# EAGLE board Front ECU rev6 (EAGLE 8.4.1), part 1 of 2
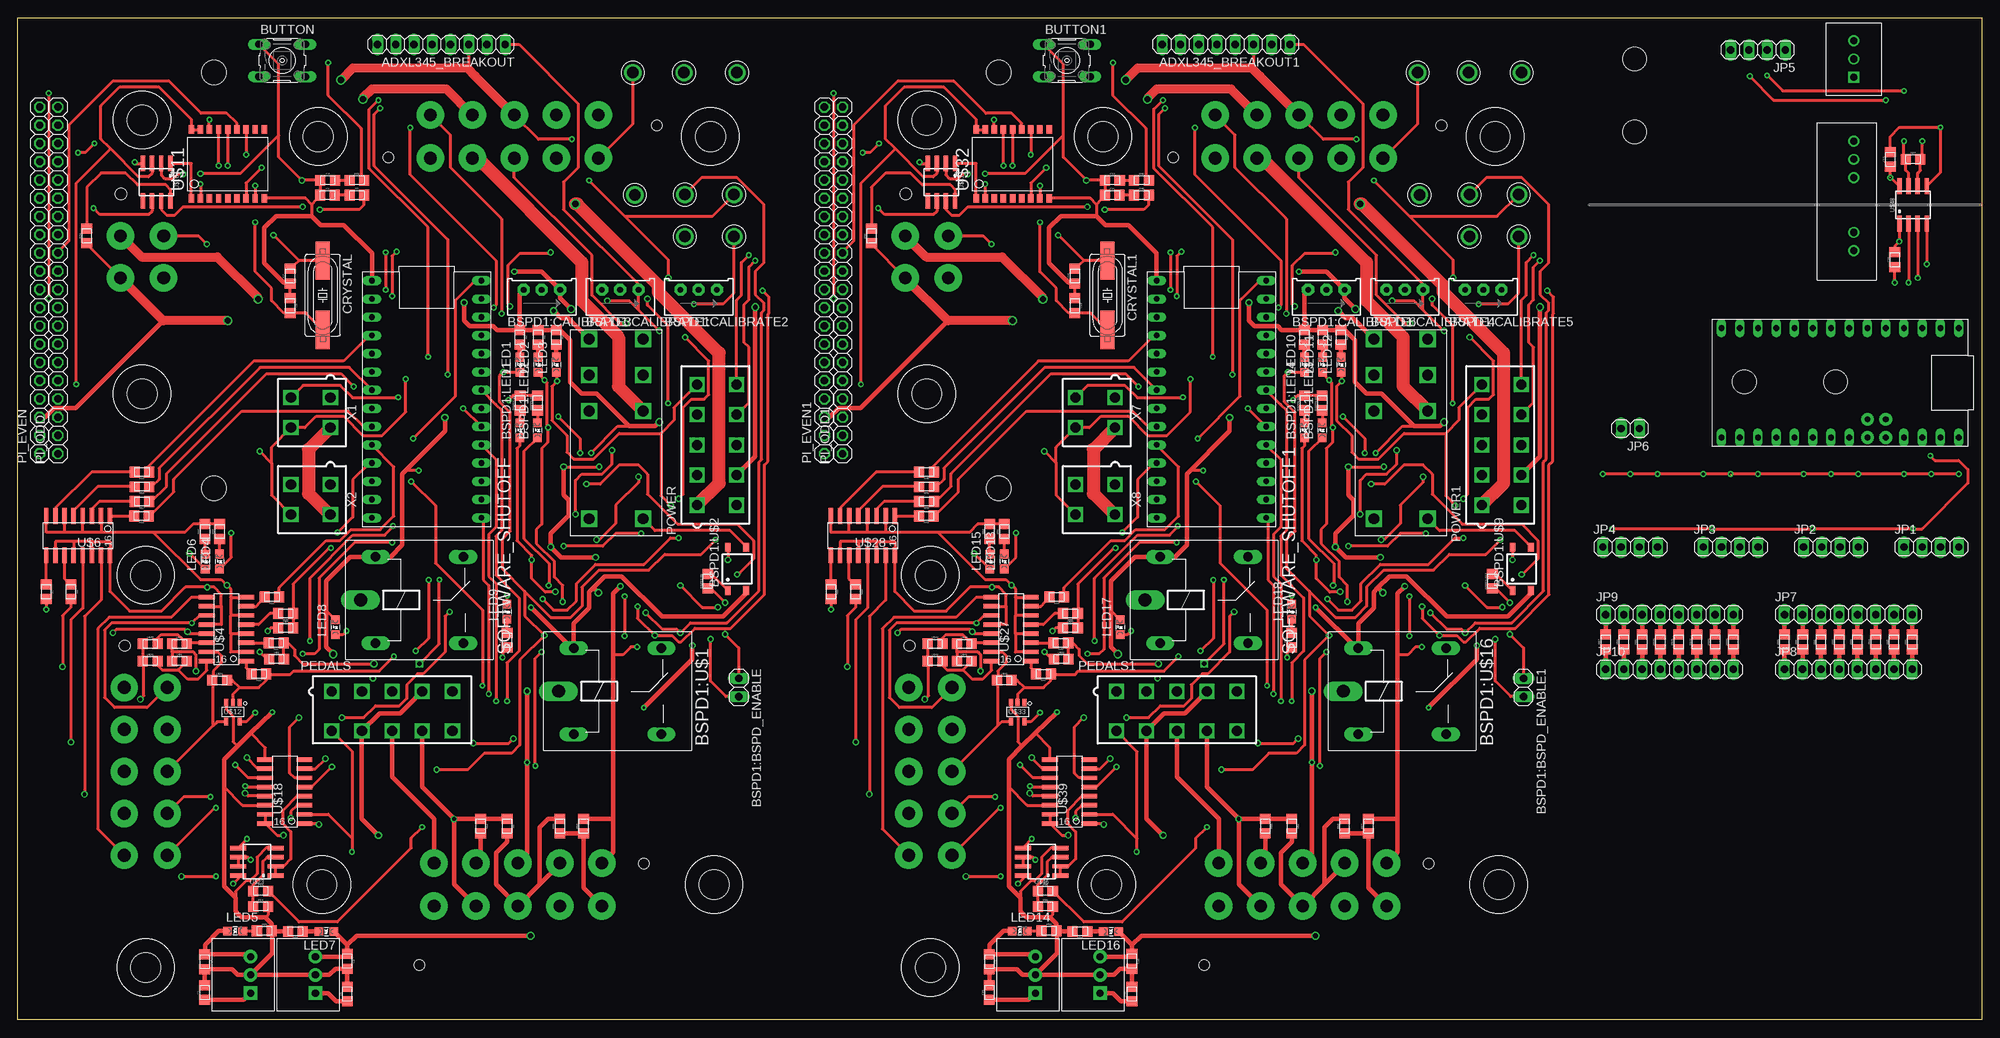
[diagram p0: board, top side]
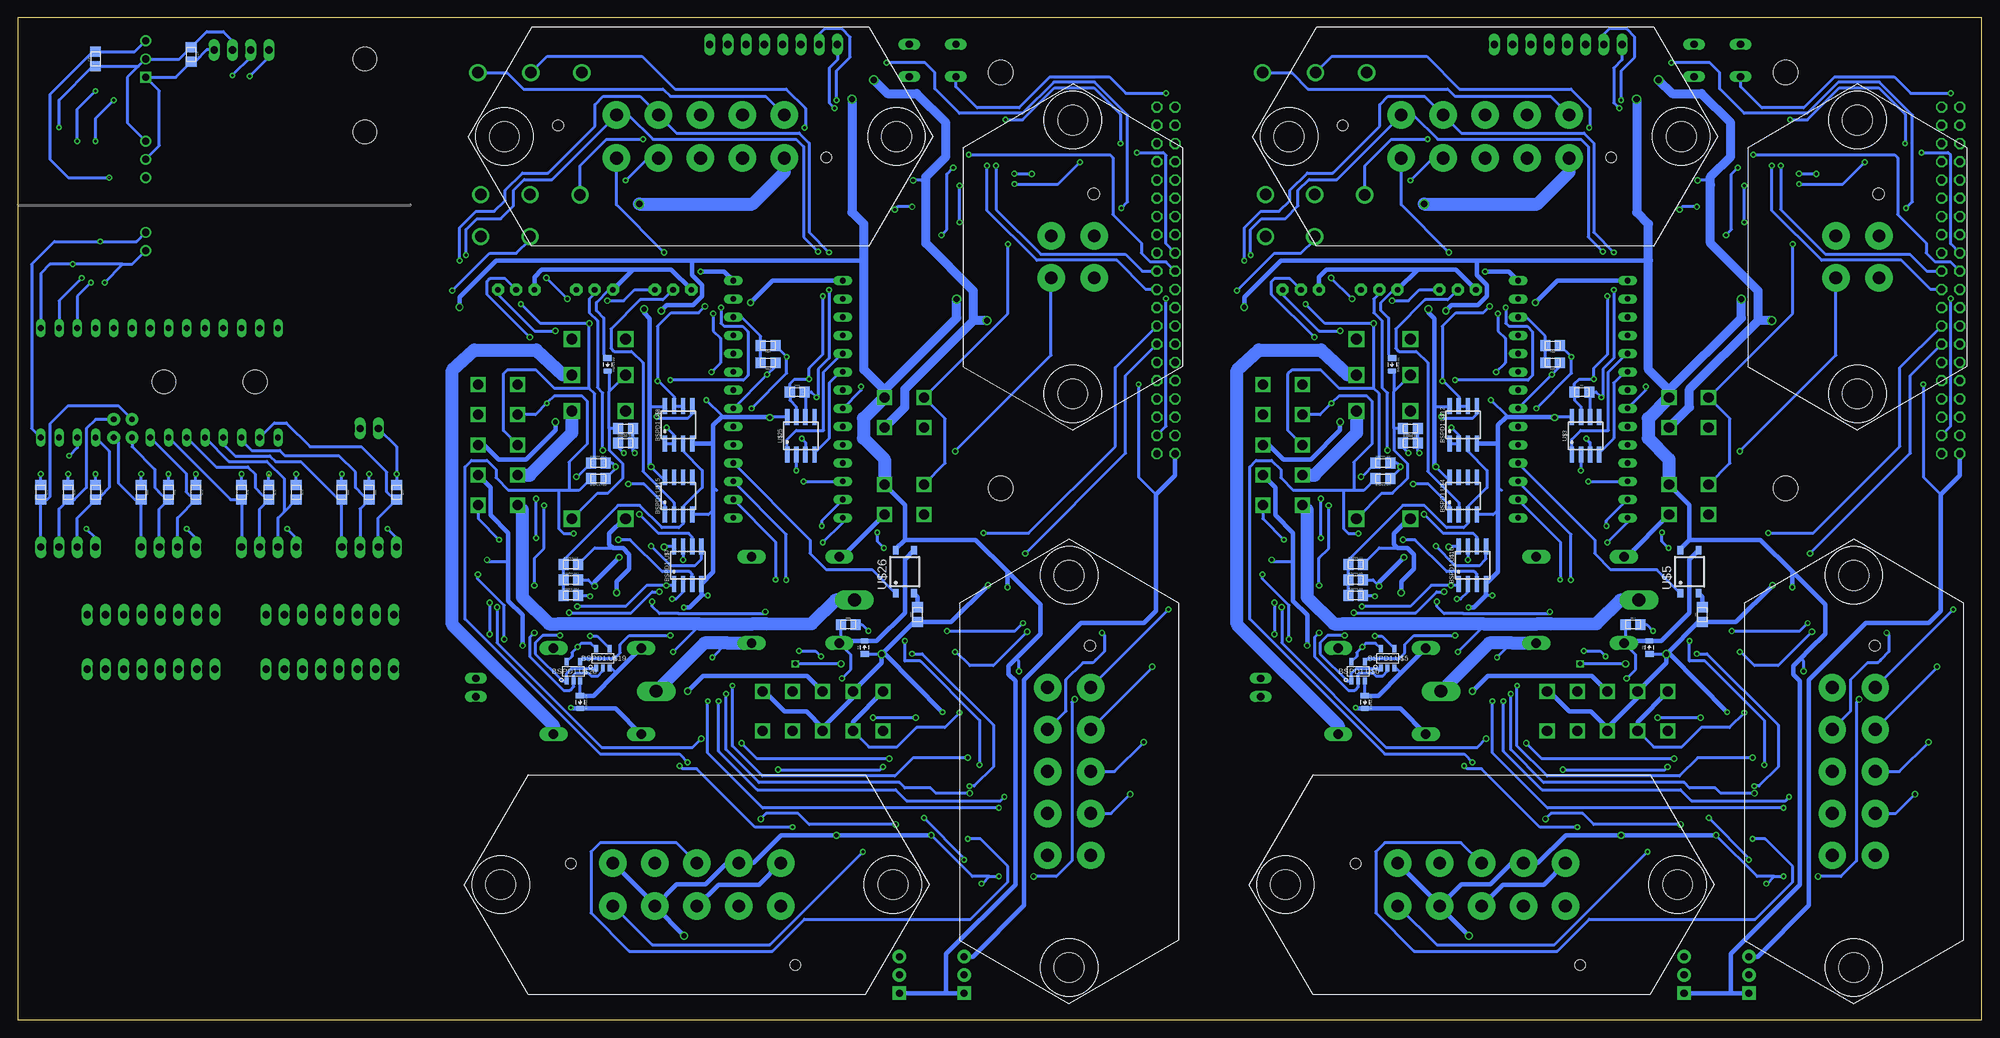
[diagram p1: board, bottom side, seen from below]

Size 273.3 x 139.45 mm. Coordinates in mm from the lower left corner, seen from the top.
Outline: 0,0 0,139.45 273.3,139.45 273.3,0 0,0
Copper layers (1*16): Top 0.035mm / dielectric 1.5mm / Bottom 0.035mm
Design rules "DRC Advanced Circuits": minimum track width 6mil, minimum drill 15mil, track to track 6mil, track to pad 6mil, pad to pad 6mil, via to via 6mil, smd to smd 6mil, copper to edge 40mil, drill to drill 6mil, minimum pad ring 10mil, minimum via ring 8mil, stop-mask expansion 4mil, vias tented up to drill 0mil, thermal gap 10mil
Holes 3.43 mm at 27.28,131.88 27.28,73.96 136.5,131.88 136.5,73.96
Holes 3.3 mm at 225.04,133.73 225.04,123.57 240.28,88.77 252.98,88.77
Holes 1.5 mm at 88.9,124.46 198.12,124.46 55.88,7.62 165.1,7.62
tKeepout: area 23,69.7 to 31.4,78.1; area 23.1,127.6 to 31.5,136; area 132.3,69.7 to 140.6,78.1; area 132.3,127.6 to 140.7,136

## Footprints (pad centres in the part's own frame; a part is rotated, then mirrored left to right if it is on the bottom)
1X08 = drill 1.016 long: 1 -8.89,0; 2 -6.35,0; 3 -3.81,0; 4 -1.27,0; 5 1.27,0; 6 3.81,0; 7 6.35,0; 8 8.89,0
1X02 = drill 1.016 long: 1 -1.27,0; 2 1.27,0
0805 = smd 1.4 x 1.5: 1 -1.025,0; 2 1.025,0
TRIMPOT_3296 = drill 0.813 pad 1.676 octagon: 1 2.54,1.27; 2 0,1.27; 3 -2.54,1.27
0805_D = smd 0.8 x 1.2: A -0.9,0; C 0.9,0
LED-805 = smd 1.2 x 1.2: A 0,-1.05; C 0,1.05
ZF112 = drill 1.321 long: 1 4.064,14.884; 2 4.064,2.896; O 16.256,14.884; S 16.256,2.896 | drill 1.803 long: P 1.956,8.89
SOP04 = smd 0.8 x 1.2: 1 -1.27,-3; 2 1.27,-3; 3 1.27,3; 4 -1.27,3
JW2SN = drill 1.5 square: 2 10.008,0; 3 5.004,0; 4 0,0; 5 0,7.493; 6 5.004,7.493; 7 10.008,7.493; COIL+ 25.019,0; COIL- 25.019,7.493
SOIC-08 = smd 0.6 x 2.2: 1 -1.905,-2.6; 2 -0.635,-2.6; 3 0.635,-2.6; 4 1.905,-2.6; 5 1.905,2.6; 6 0.635,2.6; 7 -0.635,2.6; 8 -1.905,2.6
SOT-23-5 = smd 1 x 0.55: 1 -1.35,0.95; 2 -1.35,0; 3 -1.35,-0.95; 4 1.35,-0.95; 5 1.35,0.95
TEST_POINT = drill 1.6: P$1 0,0
B3F-10XX = drill 1.016 long: 1 -3.251,2.261; 2 3.251,2.261; 3 -3.251,-2.261; 4 3.251,-2.261
HC49UP = smd 5.334 x 1.93: 1 -4.826,0; 2 4.826,0
OKI-78SR = drill 1 pad 1.88 square: 1 -2.54,0 | drill 1 pad 1.88: 2 0,0; 3 2.54,0
TO-220-SPACED = drill 1 square: 1 -2.54,0 | drill 1: 2 0,0; 3 2.54,0
1X04 = drill 1.016 long: 1 -3.81,0; 2 -1.27,0; 3 1.27,0; 4 3.81,0
MINIFIT_5566-10 = drill 1.4 square: 1 8.4,-2.75; 2 4.2,-2.75; 3 0,-2.75; 4 -4.2,-2.75; 5 -8.4,-2.75; 6 8.4,2.75; 7 4.2,2.75; 8 0,2.75; 9 -4.2,2.75; 10 -8.4,2.75
1X20 = drill 1.016 octagon: 1 0,0; 2 2.54,0; 3 5.08,0; 4 7.62,0; 5 10.16,0; 6 12.7,0; 7 15.24,0; 8 17.78,0; 9 20.32,0; 10 22.86,0; 11 25.4,0; 12 27.94,0; 13 30.48,0; 14 33.02,0; 15 35.56,0; 16 38.1,0; 17 40.64,0; 18 43.18,0; 19 45.72,0; 20 48.26,0
TEENSY_3.2_SIMPLE = drill 0.8 long: 3.3V 16.51,29.21; A0 16.51,3.81; A1 16.51,6.35; A2 16.51,8.89; A3 16.51,11.43; A4 16.51,13.97; A5 16.51,16.51; A6 16.51,19.05; A7 16.51,21.59; A8 16.51,24.13; A9 16.51,26.67; AGND 16.51,31.75; D0(RX1) 1.27,31.75; D1(TX1) 1.27,29.21; D2 1.27,26.67; D3(CANTX) 1.27,24.13; D4(CANRX) 1.27,21.59; D5 1.27,19.05; D6 1.27,16.51; D7(RX3) 1.27,13.97; D8(TX3) 1.27,11.43; D9(RX2) 1.27,8.89; D10(TX2) 1.27,6.35; D11 1.27,3.81; D12 1.27,1.27; D13 16.51,1.27; GND 1.27,34.29; VIN 16.51,34.29
SOIC-16 = smd 0.6 x 2.2: 1 -4.445,-2.794; 2 -3.175,-2.794; 3 -1.905,-2.794; 4 -0.635,-2.794; 5 0.635,-2.794; 6 1.905,-2.794; 7 3.175,-2.794; 8 4.445,-2.794; 9 4.445,2.667; 10 3.175,2.667; 11 1.905,2.667; 12 0.635,2.667; 13 -0.635,2.667; 14 -1.905,2.667; 15 -3.175,2.667; 16 -4.445,2.667
SOIC-18W = smd 0.762 x 1.143: 1 -5.08,-4.788; 2 -3.81,-4.788; 3 -2.54,-4.788; 4 -1.27,-4.788; 5 0,-4.788; 6 1.27,-4.788; 7 2.54,-4.788; 8 3.81,-4.788; 9 5.08,-4.788; 10 5.08,4.788; 11 3.81,4.788; 12 2.54,4.788; 13 1.27,4.788; 14 0,4.788; 15 -1.27,4.788; 16 -2.54,4.788; 17 -3.81,4.788; 18 -5.08,4.788
TEENSY_3.2_12ANALOG = drill 0.8 long: 3.3V 16.51,29.21; A0 16.51,3.81; A1 16.51,6.35; A2 16.51,8.89; A3 16.51,11.43; A4 16.51,13.97; A5 16.51,16.51; A6 16.51,19.05; A9 16.51,26.67; AGND 16.51,31.75; D0(RX1) 1.27,31.75; D1(TX1) 1.27,29.21; D2 1.27,26.67; D3(CANTX) 1.27,24.13; D4(CANRX) 1.27,21.59; D5 1.27,19.05; D6 1.27,16.51; D7(RX3) 1.27,13.97; D8(TX3) 1.27,11.43; D9(RX2) 1.27,8.89; D10(TX2) 1.27,6.35; D11 1.27,3.81; D12 1.27,1.27; D13 16.51,1.27; GND 1.27,34.29; VIN 16.51,34.29 | drill 0.8 pad 1.778: A7 16.51,21.59; A8 16.51,24.13; A10 13.97,24.13; A11 13.97,21.59
DCDC-CONVERTER = drill 0.991: +VIN -6.35,0; +VOUT 3.81,0; -VIN -8.89,0; -VOUT 6.35,0; CONTROL -3.81,0
MINIFIT_5566-4 = drill 1.4 square: 1 2.1,-2.75; 2 -2.1,-2.75; 3 2.1,2.75; 4 -2.1,2.75
MX150L_VERTICAL-4 = drill 1.778 pad 3.81: 1 -2.921,2.997; 2 2.921,2.997; 3 -2.921,-2.997; 4 2.921,-2.997 | hole 4.191: -19.05,0; 19.05,0 | hole 1.651: -8.763,2.921
MX150L_VERTICAL-10 = drill 1.778 pad 3.81: 1 -11.684,2.997; 2 -5.842,2.997; 3 0,2.997; 4 5.842,2.997; 5 11.684,2.997; 6 -11.684,-2.997; 7 -5.842,-2.997; 8 0,-2.997; 9 5.842,-2.997; 10 11.684,-2.997 | hole 4.191: -27.292,0; 27.292,0 | hole 1.524: -17.526,2.921

## Placement (x,y rotation side)
ADXL345_BREAKOUT  [1X08]  58.93,135.76 180 top
ADXL345_BREAKOUT1  [1X08]  168.15,135.76 180 top
BSPD1:BSPD_ENABLE  JUMPER  [1X02]  100.33,46.23 270 top
BSPD1:BSPD_ENABLE1  JUMPER  [1X02]  209.55,46.23 270 top
BSPD1:C1  .47u  [0805]  87.12,63.37 0 bottom
BSPD1:C2  .47u  [0805]  196.34,63.37 0 bottom
BSPD1:CALIBRATE1  [TRIMPOT_3296]  83.82,100.33 0 top
BSPD1:CALIBRATE2  [TRIMPOT_3296]  94.74,100.33 0 top
BSPD1:CALIBRATE3  [TRIMPOT_3296]  72.9,100.33 0 top
BSPD1:CALIBRATE4  [TRIMPOT_3296]  193.04,100.33 0 top
BSPD1:CALIBRATE5  [TRIMPOT_3296]  203.96,100.33 0 top
BSPD1:CALIBRATE6  [TRIMPOT_3296]  182.12,100.33 0 top
BSPD1:D1  DIODE0805  [0805_D]  82.04,91.19 270 bottom
BSPD1:D2  DIODE0805  [0805_D]  85.85,44.2 270 bottom
BSPD1:D3  DIODE0805  [0805_D]  191.26,91.19 270 bottom
BSPD1:D4  DIODE0805  [0805_D]  195.07,44.2 270 bottom
BSPD1:LED1  RED  [LED-805]  69.88,82.04 0 top
BSPD1:LED2  YELLOW  [LED-805]  72.31,82.04 0 top
BSPD1:LED3  YELLOW  [LED-805]  181.53,82.04 0 top
BSPD1:LED4  RED  [LED-805]  179.1,82.04 0 top
BSPD1:R1  12k  [0805]  79.5,80.26 0 bottom
BSPD1:R2  43k  [0805]  79.5,82.3 180 bottom
BSPD1:R3  330  [0805]  87.12,59.05 0 bottom
BSPD1:R4  10k  [0805]  83.31,75.31 180 bottom
BSPD1:R5  680k  [0805]  87.12,61.21 0 bottom
BSPD1:R6  680  [0805]  96.01,61.04 90 top
BSPD1:R7  10k  [0805]  83.31,77.47 0 bottom
BSPD1:R8  270  [0805]  72.31,85.85 90 top
BSPD1:R9  270  [0805]  69.88,85.85 90 top
BSPD1:R10  330  [0805]  196.34,59.05 0 bottom
BSPD1:R11  680k  [0805]  196.34,61.21 0 bottom
BSPD1:R12  680  [0805]  205.23,61.04 90 top
BSPD1:R13  10k  [0805]  192.53,75.31 180 bottom
BSPD1:R14  10k  [0805]  192.53,77.47 0 bottom
BSPD1:R15  270  [0805]  181.53,85.85 90 top
BSPD1:R16  270  [0805]  179.1,85.85 90 top
BSPD1:R17  12k  [0805]  188.72,80.26 0 bottom
BSPD1:R18  43k  [0805]  188.72,82.3 180 bottom
BSPD1:U$1  G5LE  [ZF112]  73.28,36.83 0 top
BSPD1:U$2  CPC1002N  [SOP04]  100.08,62.74 0 top
BSPD1:U$3  JW2SN-DC12V  [JW2SN]  79.5,94.74 270 top
BSPD1:U$4  MCP6542SOIC  [SOIC-08]  72.14,72.9 0 bottom
BSPD1:U$5  SN74AHC1G09  [SOT-23-5]  82.68,50.29 90 bottom
BSPD1:U$6  SN74LVC1G08  [SOT-23-5]  86.77,48.49 90 bottom
BSPD1:U$7  MCP6542SOIC  [SOIC-08]  180.09,63.25 0 bottom
BSPD1:U$8  MCP6002SOIC  [SOIC-08]  181.36,82.8 0 bottom
BSPD1:U$9  CPC1002N  [SOP04]  209.3,62.74 0 top
BSPD1:U$10  MCP6542SOIC  [SOIC-08]  70.87,63.25 0 bottom
BSPD1:U$11  TEST_POINT  [TEST_POINT]  92.81,114.86 0 top
BSPD1:U$12  MCP6002SOIC  [SOIC-08]  72.14,82.8 0 bottom
BSPD1:U$13  TEST_POINT  [TEST_POINT]  92.81,109.02 0 top
BSPD1:U$14  JW2SN-DC12V  [JW2SN]  188.72,94.74 270 top
BSPD1:U$15  MCP6542SOIC  [SOIC-08]  181.36,72.9 0 bottom
BSPD1:U$16  G5LE  [ZF112]  182.5,36.83 0 top
BSPD1:U$17  TEST_POINT  [TEST_POINT]  202.03,114.86 0 top
BSPD1:U$18  TEST_POINT  [TEST_POINT]  202.03,109.02 0 top
BSPD1:U$19  SN74AHC1G09  [SOT-23-5]  191.9,50.29 90 bottom
BSPD1:U$20  SN74LVC1G08  [SOT-23-5]  195.99,48.49 90 bottom
BUTTON  [B3F-10XX]  36.78,133.53 0 top
BUTTON1  [B3F-10XX]  146,133.53 0 top
C1  10uF  [0805]  25.98,3.76 90 top
C2  10uF  [0805]  25.98,8.05 270 top
C3  560pF  [0805]  43.08,114.76 0 top
C4  560pF  [0805]  43.1,116.84 0 top
C5  10uF  [0805]  45.85,3.56 90 top
C6  22pF  [0805]  37.87,99.39 270 top
C7  22pF  [0805]  37.87,103.5 90 top
C8  10uF  [0805]  45.85,8.13 270 top
C9  10uF  [0805]  135.2,8.05 270 top
C10  10uF  [0805]  135.2,3.76 90 top
C11  560pF  [0805]  152.3,114.76 0 top
C12  560pF  [0805]  152.32,116.84 0 top
C13  22pF  [0805]  147.09,99.39 270 top
C14  22pF  [0805]  147.09,103.5 90 top
C15  10uF  [0805]  155.07,3.56 90 top
C16  10uF  [0805]  155.07,8.13 270 top
C17  0.1u  [0805]  260.6,119.76 90 top
C18  0.1u  [0805]  261.24,105.79 90 top
C19  0.33u  [0805]  249.17,134.37 270 bottom
C20  0.1u  [0805]  262.51,133.73 90 bottom
CRYSTAL  16MHz  [HC49UP]  42.42,100.84 270 top
CRYSTAL1  16MHz  [HC49UP]  151.64,100.84 270 top
D1  DIODE0805  [0805_D]  155.45,51.82 90 bottom
D3  DIODE0805  [0805_D]  46.23,51.82 90 bottom
IC1  OKI-78SR  [OKI-78SR]  141.6,6.22 90 top
IC2  OKI-78SR  [OKI-78SR]  32.38,6.22 90 top
IC3  OKI-78SR  [OKI-78SR]  41.4,6.22 90 top
IC4  OKI-78SR  [OKI-78SR]  150.62,6.22 90 top
IC5  [TO-220-SPACED]  255.52,133.73 90 top
JP1  [1X04]  266.32,65.79 0 top
JP2  [1X04]  252.35,65.79 0 top
JP3  [1X04]  238.38,65.79 0 top
JP4  [1X04]  224.41,65.79 0 top
JP5  [1X04]  242.19,135 180 top
JP6  M02  [1X02]  224.41,82.3 180 top
JP7  [1X08]  254.76,56.39 0 top
JP8  [1X08]  254.76,48.77 0 top
JP9  [1X08]  229.87,56.39 0 top
JP10  [1X08]  229.87,48.77 0 top
LED1  RED  [LED-805]  69.85,91.19 0 top
LED2  YELLOW  [LED-805]  72.39,91.19 0 top
LED3  GREEN  [LED-805]  74.93,91.19 0 top
LED4  GREEN  [LED-805]  28.07,63.78 0 top
LED5  PURPLE  [LED-805]  30.23,12.34 270 top
LED6  RED  [LED-805]  26.06,63.75 0 top
LED7  PURPLE  [LED-805]  42.93,12.27 90 top
LED8  RED  [LED-805]  44.2,54.61 0 top
LED9  RED  [LED-805]  68.07,56.77 0 top
LED10  RED  [LED-805]  179.07,91.19 0 top
LED11  YELLOW  [LED-805]  181.61,91.19 0 top
LED12  GREEN  [LED-805]  184.15,91.19 0 top
LED13  GREEN  [LED-805]  137.29,63.78 0 top
LED14  PURPLE  [LED-805]  139.45,12.34 270 top
LED15  RED  [LED-805]  135.28,63.75 0 top
LED16  PURPLE  [LED-805]  152.15,12.27 90 top
LED17  RED  [LED-805]  153.42,54.61 0 top
LED18  RED  [LED-805]  177.29,56.77 0 top
PEDALS  MINIFIT_5566-10  [MINIFIT_5566-10]  52.07,42.93 180 top
PEDALS1  MINIFIT_5566-10  [MINIFIT_5566-10]  161.29,42.93 180 top
PI_EVEN  [1X20]  3.02,78.79 90 top
PI_EVEN1  [1X20]  112.24,78.79 90 top
PI_ODD  [1X20]  5.56,78.79 90 top
PI_ODD1  [1X20]  114.78,78.79 90 top
POWER  MINIFIT_5566-10  [MINIFIT_5566-10]  97.28,80.01 270 top
POWER1  MINIFIT_5566-10  [MINIFIT_5566-10]  206.5,80.01 270 top
R1  120  [0805]  55.63,87.38 0 bottom
R2  270  [0805]  69.85,95 270 top
R3  270  [0805]  72.39,95 270 top
R4  200  [0805]  74.93,95 270 top
R5  100  [0805]  47.17,114.78 0 top
R6  330  [0805]  38.86,56.39 90 bottom
R7  0  [0805]  3.94,59.56 270 top
R8  0  [0805]  7.37,59.56 270 top
R9  10k  [0805]  68.07,26.92 270 top
R10  10k  [0805]  78.74,26.92 90 top
R11  10k  [0805]  64.39,26.92 270 top
R12  1.2K  [0805]  48.51,54.99 0 bottom
R13  43k  [0805]  33.78,17.91 0 top
R14  12k  [0805]  33.78,15.75 0 top
R15  270  [0805]  17.25,76.23 180 top
R16  270  [0805]  17.25,74.19 180 top
R17  270  [0805]  17.25,72.11 180 top
R18  270  [0805]  17.2,70.1 180 top
R19  270  [0805]  35.36,58.83 180 top
R20  270  [0805]  37.26,56.54 180 top
R21  270  [0805]  35.94,52.45 180 top
R22  270  [0805]  33.53,48.13 180 top
R23  100  [0805]  47.17,116.84 0 top
R24  4.7k  [0805]  9.58,109.09 90 top
R25  200  [0805]  28.07,67.94 90 top
R26  200  [0805]  34.29,12.34 0 top
R27  270  [0805]  26.04,67.94 90 top
R28  200  [0805]  38.61,12.27 180 top
R29  1.2K  [0805]  68.07,52.83 90 top
R30  10k  [0805]  75.44,26.92 90 top
R31  4.7k  [0805]  59.69,91.44 180 bottom
R32  4.7k  [0805]  59.69,93.85 180 bottom
R33  120  [0805]  164.85,87.38 0 bottom
R34  270  [0805]  179.07,95 270 top
R35  270  [0805]  181.61,95 270 top
R36  200  [0805]  184.15,95 270 top
R37  330  [0805]  148.08,56.39 90 bottom
R38  43k  [0805]  143,17.91 0 top
R39  12k  [0805]  143,15.75 0 top
R40  270  [0805]  126.47,76.23 180 top
R41  270  [0805]  126.47,74.19 180 top
R42  270  [0805]  126.47,72.11 180 top
R43  270  [0805]  126.42,70.1 180 top
R44  270  [0805]  144.58,58.83 180 top
R45  270  [0805]  146.48,56.54 180 top
R46  270  [0805]  145.16,52.45 180 top
R47  270  [0805]  142.75,48.13 180 top
R48  100  [0805]  156.39,114.78 0 top
R49  100  [0805]  156.39,116.84 0 top
R50  4.7k  [0805]  118.8,109.09 90 top
R51  200  [0805]  137.29,67.94 90 top
R52  200  [0805]  143.51,12.34 0 top
R53  270  [0805]  135.25,67.94 90 top
R54  200  [0805]  147.83,12.27 180 top
R55  0  [0805]  113.16,59.56 270 top
R56  0  [0805]  116.59,59.56 270 top
R57  10k  [0805]  187.96,26.92 90 top
R58  10k  [0805]  173.61,26.92 270 top
R59  1.2K  [0805]  157.73,54.99 0 bottom
R60  1.2K  [0805]  177.29,52.83 90 top
R61  10k  [0805]  177.29,26.92 270 top
R62  10k  [0805]  184.66,26.92 90 top
R63  4.7k  [0805]  168.91,91.44 180 bottom
R64  4.7k  [0805]  168.91,93.85 180 bottom
R65  [0805]  262.51,73.41 270 bottom
R66  [0805]  224.41,73.41 270 bottom
R67  120  [0805]  263.78,119.76 0 top
R68  [0805]  256.16,73.41 270 bottom
R69  [0805]  228.22,73.41 270 bottom
R70  [0805]  266.32,73.41 270 bottom
R71  [0805]  270.13,73.41 270 bottom
R72  [0805]  248.54,73.41 270 bottom
R73  [0805]  252.35,73.41 270 bottom
R74  [0805]  234.57,73.41 270 bottom
R75  [0805]  238.38,73.41 270 bottom
R76  [0805]  242.19,73.41 270 bottom
R77  [0805]  220.6,73.41 270 bottom
R89  [0805]  245.87,52.58 90 top
R90  [0805]  248.41,52.58 90 top
R91  [0805]  250.95,52.58 90 top
R92  [0805]  253.49,52.58 90 top
R93  [0805]  256.03,52.58 90 top
R94  [0805]  258.57,52.58 90 top
R95  [0805]  261.11,52.58 90 top
R96  [0805]  263.65,52.58 90 top
R97  [0805]  220.98,52.58 90 top
R98  [0805]  223.52,52.58 90 top
R99  [0805]  226.06,52.58 90 top
R100  [0805]  228.6,52.58 90 top
R101  [0805]  231.14,52.58 90 top
R102  [0805]  233.68,52.58 90 top
R103  [0805]  236.22,52.58 90 top
R104  [0805]  238.76,52.58 90 top
SOFTWARE_SHUTOFF  G5LE  [ZF112]  45.72,49.53 0 top
SOFTWARE_SHUTOFF1  G5LE  [ZF112]  154.94,49.53 0 top
U$1  TEENSY_3.2_SIMPLE  [TEENSY_3.2_SIMPLE]  48.01,68.58 0 top
U$2  TEST_POINT  [TEST_POINT]  85.85,114.81 0 top
U$3  MCP2551  [SOIC-08]  55.12,81.28 0 bottom
U$4  TLP291-4  [SOIC-16]  28.96,54.36 90 top
U$5  CPC1002N  [SOP04]  40.64,62.36 0 bottom
U$6  TLP291-4  [SOIC-16]  8.38,67.31 180 top
U$7  JUMPER  [0805]  37.26,54.51 0 top
U$8  JUMPER  [0805]  35.99,50.19 0 top
U$9  JUMPER  [0805]  22.48,49.91 0 top
U$10  MCP2551  [SOIC-08]  19.3,116.59 180 top
U$11  MCP2515SMD  [SOIC-18W]  29.21,119.13 0 top
U$12  SN74LV1T34  [SOT-23-5]  29.92,42.82 270 top
U$13  TEST_POINT  [TEST_POINT]  99.67,114.86 0 top
U$14  TEST_POINT  [TEST_POINT]  99.67,109.02 0 top
U$15  TEST_POINT  [TEST_POINT]  85.6,131.83 0 top
U$16  TEST_POINT  [TEST_POINT]  92.71,131.83 0 top
U$17  TEST_POINT  [TEST_POINT]  100.08,131.83 0 top
U$18  MCP3208SOIC  [SOIC-16]  37.08,31.75 90 top
U$19  JUMPER  [0805]  28.07,47.24 0 top
U$20  JUMPER  [0805]  18.41,49.91 0 top
U$21  JUMPER  [0805]  22.48,52.32 0 top
U$22  JUMPER  [0805]  18.41,52.32 0 top
U$23  MCP6002SOIC  [SOIC-08]  33.27,21.97 90 top
U$24  TEENSY_3.2_SIMPLE  [TEENSY_3.2_SIMPLE]  157.23,68.58 0 top
U$25  MCP2551  [SOIC-08]  164.34,81.28 0 bottom
U$26  CPC1002N  [SOP04]  149.86,62.36 0 bottom
U$27  TLP291-4  [SOIC-16]  138.18,54.36 90 top
U$28  TLP291-4  [SOIC-16]  117.6,67.31 180 top
U$29  JUMPER  [0805]  146.48,54.51 0 top
U$30  JUMPER  [0805]  145.21,50.19 0 top
U$31  MCP2551  [SOIC-08]  128.52,116.59 180 top
U$32  MCP2515SMD  [SOIC-18W]  138.43,119.13 0 top
U$33  SN74LV1T34  [SOT-23-5]  139.14,42.82 270 top
U$34  TEST_POINT  [TEST_POINT]  208.89,114.86 0 top
U$35  TEST_POINT  [TEST_POINT]  208.89,109.02 0 top
U$36  TEST_POINT  [TEST_POINT]  194.82,131.83 0 top
U$37  TEST_POINT  [TEST_POINT]  201.93,131.83 0 top
U$38  TEST_POINT  [TEST_POINT]  209.3,131.83 0 top
U$39  MCP3208SOIC  [SOIC-16]  146.3,31.75 90 top
U$40  JUMPER  [0805]  137.29,47.24 0 top
U$41  JUMPER  [0805]  131.7,49.91 0 top
U$42  JUMPER  [0805]  127.64,49.91 0 top
U$43  JUMPER  [0805]  131.7,52.32 0 top
U$44  JUMPER  [0805]  127.64,52.32 0 top
U$45  TEST_POINT  [TEST_POINT]  195.07,114.81 0 top
U$46  MCP6002SOIC  [SOIC-08]  142.49,21.97 90 top
U$47  TEENSY_3.2_12ANALOG  [TEENSY_3.2_12ANALOG]  235.84,97.54 270 top
U$48  ISO1050CAN  [SOIC-08]  263.78,113.41 0 top
U$49  NCS1S1205SC-12V-5VCONVERTER  [DCDC-CONVERTER]  255.52,113.41 270 top
X1  CONNECTOR-4  [MINIFIT_5566-4]  40.74,84.51 90 top
X2  CONNECTOR-4  [MINIFIT_5566-4]  40.74,72.39 90 top
X3  CONNECTOR-4MX150L_VERTICAL-4  [MX150L_VERTICAL-4]  17.27,106.17 270 bottom
X4  CONNECTOR-10MX150L_VERTICAL-10  [MX150L_VERTICAL-10]  69.6,18.8 0 bottom
X5  CONNECTOR-10MX150L_VERTICAL-10  [MX150L_VERTICAL-10]  69.09,122.94 180 bottom
X6  CONNECTOR-10MX150L_VERTICAL-10  [MX150L_VERTICAL-10]  17.78,34.54 270 bottom
X7  CONNECTOR-4  [MINIFIT_5566-4]  149.96,84.51 90 top
X8  CONNECTOR-4  [MINIFIT_5566-4]  149.96,72.39 90 top
X9  CONNECTOR-4MX150L_VERTICAL-4  [MX150L_VERTICAL-4]  126.49,106.17 270 bottom
X10  CONNECTOR-10MX150L_VERTICAL-10  [MX150L_VERTICAL-10]  178.82,18.8 0 bottom
X11  CONNECTOR-10MX150L_VERTICAL-10  [MX150L_VERTICAL-10]  178.31,122.94 180 bottom
X12  CONNECTOR-10MX150L_VERTICAL-10  [MX150L_VERTICAL-10]  127,34.54 270 bottom

## Library data of the parts
ADXL345_BREAKOUT ADXL345_BREAKOUT1 BSPD1:BSPD_ENABLE BSPD1:BSPD_ENABLE1 BSPD1:C1 BSPD1:C2 BSPD1:CALIBRATE1-BSPD1:CALIBRATE6 BSPD1:D1-BSPD1:D4 BSPD1:LED1-BSPD1:LED4 BSPD1:R1-BSPD1:R18 BSPD1:U$1-BSPD1:U$20 C1-C20 D1 D3 IC1-IC5 JP1-JP10 LED1-LED18 PI_EVEN PI_EVEN1 PI_ODD PI_ODD1 R1-R77 R89-R104 SOFTWARE_SHUTOFF SOFTWARE_SHUTOFF1 U$1-U$49 X3-X6 X9-X12 = HyTechDevices
BUTTON BUTTON1 = HyTechDevices; MPN: B3F-1000; OC_FARNELL: 176432; OC_NEWARK: 36M3542
CRYSTAL CRYSTAL1 = SparkFun-FreqCtrl
PEDALS PEDALS1 POWER POWER1 X1 X2 X7 X8 = HyTechDevices; OC_FARNELL: unknown; OC_NEWARK: unknown

## Nets
3.3V: JP1.1 JP2.1 JP3.1 JP4.1 U$47.3.3V
3.3V+: R31.2 R32.2 U$1.3.3V
3.3V+1: R63.2 R64.2 U$24.3.3V
+5V: ADXL345_BREAKOUT.1 BSPD1:CALIBRATE1.1 BSPD1:CALIBRATE2.1 BSPD1:CALIBRATE3.1 BSPD1:R4.1 BSPD1:R5.2 BSPD1:R7.2 BSPD1:U$4.8 BSPD1:U$5.5 BSPD1:U$6.5 BSPD1:U$10.8 BSPD1:U$12.8 C8.1 IC3.3 LED7.A PEDALS.1 PEDALS.4 PEDALS.7 R10.2 R11.2 U$1.VIN U$3.3 U$12.5 U$18.15 U$18.16 U$20.1 U$22.1 U$23.8 X4.1 X4.4 X4.7
+5V1: ADXL345_BREAKOUT1.1 BSPD1:CALIBRATE4.1 BSPD1:CALIBRATE5.1 BSPD1:CALIBRATE6.1 BSPD1:R11.2 BSPD1:R13.1 BSPD1:R14.2 BSPD1:U$7.8 BSPD1:U$8.8 BSPD1:U$15.8 BSPD1:U$19.5 BSPD1:U$20.5 C16.1 IC4.3 LED16.A PEDALS1.1 PEDALS1.4 PEDALS1.7 R57.2 R58.2 U$24.VIN U$25.3 U$33.5 U$39.15 U$39.16 U$42.1 U$44.1 U$46.8 X10.1 X10.4 X10.7
+5V/1: C2.1 IC2.3 LED5.A PI_EVEN.1 U$10.3 U$11.17 U$11.18
+5V/2: C9.1 IC1.3 LED14.A PI_EVEN1.1 U$31.3 U$32.17 U$32.18
+12V: BSPD1:D2.C BSPD1:U$1.2 BSPD1:U$2.4 BSPD1:U$3.4 C1.1 C5.1 IC2.1 IC3.1 POWER.7 U$4.10 U$4.12 U$5.4 U$6.10 U$6.12 U$6.14 U$6.16 U$9.1 U$21.1 X1.1 X2.1 X3.1 X5.7
+12V1: BSPD1:D4.C BSPD1:U$9.4 BSPD1:U$14.4 BSPD1:U$16.2 C10.1 C15.1 IC1.1 IC4.1 POWER1.7 U$26.4 U$27.10 U$27.12 U$28.10 U$28.12 U$28.14 U$28.16 U$41.1 U$43.1 X7.1 X8.1 X9.1 X11.7
BSPD1:N$1: BSPD1:D1.C BSPD1:R2.2 BSPD1:U$2.3 BSPD1:U$3.3 BSPD1:U$3.COIL-
BSPD1:N$2: BSPD1:R3.2 BSPD1:U$5.4
BSPD1:N$3: BSPD1:R6.2 BSPD1:U$2.1
BSPD1:N$4: BSPD1:BSPD_ENABLE.1 BSPD1:R6.1
BSPD1:N$5: BSPD1:CALIBRATE2.2 BSPD1:U$10.2
BSPD1:N$6: BSPD1:CALIBRATE1.2 BSPD1:U$10.6
BSPD1:N$7: BSPD1:CALIBRATE3.2 BSPD1:U$4.2
BSPD1:N$8: BSPD1:BSPD_ENABLE.2 BSPD1:U$4.1
BSPD1:N$9: BSPD1:R1.2 BSPD1:R2.1 BSPD1:U$12.5
BSPD1:N$10: BSPD1:C2.1 BSPD1:R10.1 BSPD1:R11.1 BSPD1:U$8.3 BSPD1:U$15.3
BSPD1:N$11: BSPD1:CALIBRATE6.2 BSPD1:U$15.2
BSPD1:N$12: BSPD1:D3.C BSPD1:R18.2 BSPD1:U$9.3 BSPD1:U$14.3 BSPD1:U$14.COIL-
BSPD1:N$13: BSPD1:C1.1 BSPD1:R3.1 BSPD1:R5.1 BSPD1:U$4.3 BSPD1:U$12.3
BSPD1:N$14: BSPD1:LED2.C BSPD1:R8.1
BSPD1:N$15: BSPD1:LED1.C BSPD1:R9.1
BSPD1:N$16: BSPD1:LED1.A BSPD1:U$5.2 BSPD1:U$6.2 BSPD1:U$10.7 BSPD1:U$11.P$1
BSPD1:N$17: BSPD1:LED2.A BSPD1:U$5.1 BSPD1:U$6.1 BSPD1:U$10.1 BSPD1:U$13.P$1
BSPD1:N$18: BSPD1:R10.2 BSPD1:U$19.4
BSPD1:N$19: BSPD1:R12.2 BSPD1:U$9.1
BSPD1:N$20: BSPD1:LED4.C BSPD1:R16.1
BSPD1:N$21: BSPD1:LED3.C BSPD1:R15.1
BSPD1:N$22: BSPD1:LED4.A BSPD1:U$7.7 BSPD1:U$17.P$1 BSPD1:U$19.2 BSPD1:U$20.2
BSPD1:N$23: BSPD1:LED3.A BSPD1:U$7.1 BSPD1:U$18.P$1 BSPD1:U$19.1 BSPD1:U$20.1
BSPD1:N$24: BSPD1:BSPD_ENABLE1.1 BSPD1:R12.1
BSPD1:N$25: BSPD1:BSPD_ENABLE1.2 BSPD1:U$15.1
BSPD1:N$26: BSPD1:CALIBRATE5.2 BSPD1:U$7.2
BSPD1:N$27: BSPD1:CALIBRATE4.2 BSPD1:U$7.6
BSPD1:N$28: BSPD1:R17.2 BSPD1:R18.1 BSPD1:U$8.5
BSPD1:SHUTDOWN_C: BSPD1:U$1.S BSPD1:U$3.6
BSPD1:SHUTDOWN_C1: BSPD1:U$14.6 BSPD1:U$16.S
BUT: BUTTON.3 PI_ODD.2
BUT1: BUTTON1.3 PI_ODD1.2
CAN-H: R5.2 U$10.7
CAN-H1: R48.2 U$31.7
CAN-L: R23.2 U$10.6
CAN-L1: R49.2 U$31.6
CANH: POWER.10 R1.1 U$3.7 X1.4 X2.4 X3.4 X5.10
CANH1: POWER1.10 R33.1 U$25.7 X7.4 X8.4 X9.4 X11.10
CANL: POWER.9 R1.2 U$3.6 X1.3 X2.3 X3.3 X5.9
CANL1: POWER1.9 R33.2 U$25.6 X7.3 X8.3 X9.3 X11.9
CS: PI_EVEN.12 U$11.16
CS1: PI_EVEN1.12 U$32.16
CS_MCP1: U$24.D10(TX2) U$39.10
CS_MCP3208: U$1.D10(TX2) U$18.10
DASH_CTRL1: R15.1 U$1.D2
DASH_CTRL2: R16.1 U$1.D5
DASH_CTRL3: R17.1 U$1.D6
DASH_CTRL4: R18.1 U$1.D7(RX3)
DASH_CTRL5: R19.1 U$1.D8(TX3)
DASH_CTRL6: R20.1 U$1.D9(RX2) U$7.2
DASH_CTRL7: R21.1 U$1.A0 U$8.2
DASH_CTRL8: R22.1 U$1.A1 U$12.2 U$19.2
DASH_CTRL9: U$1.A3 X6.9
DASH_CTRL10: U$1.A6 X6.10
DASH_CTRL11: R41.1 U$24.D5
DASH_CTRL12: R42.1 U$24.D6
DASH_CTRL13: R43.1 U$24.D7(RX3)
DASH_CTRL14: R45.1 U$24.D9(RX2) U$29.2
DASH_CTRL15: R47.1 U$24.A1 U$33.2 U$40.2
DASH_CTRL16: U$24.A6 X12.10
DASH_CTRL17: R40.1 U$24.D2
DASH_CTRL18: R44.1 U$24.D8(TX3)
DASH_CTRL19: R46.1 U$24.A0 U$30.2
DASH_CTRL20: U$24.A3 X12.9
DASH_IO1: R7.2 X6.1
DASH_IO2: R8.2 X6.2
DASH_IO3: U$6.13 X6.3
DASH_IO4: U$6.15 X6.4
DASH_IO5: U$4.9 X6.5
DASH_IO6: U$4.11 U$7.1 X6.6
DASH_IO7: U$4.13 U$8.1 X6.7
DASH_IO8: U$4.15 U$12.4 U$19.1 X6.8
DASH_IO9: R55.2 X12.1
DASH_IO10: R56.2 X12.2
DASH_IO11: U$28.13 X12.3
DASH_IO12: U$28.15 X12.4
DASH_IO13: U$27.9 X12.5
DASH_IO14: U$27.11 U$29.1 X12.6
DASH_IO15: U$27.13 U$30.1 X12.7
DASH_IO16: U$27.15 U$33.4 U$40.1 X12.8
GND: ADXL345_BREAKOUT.3 BSPD1:C1.2 BSPD1:CALIBRATE1.3 BSPD1:CALIBRATE2.3 BSPD1:CALIBRATE3.3 BSPD1:D1.A BSPD1:D2.A BSPD1:R1.1 BSPD1:R8.2 BSPD1:R9.2 BSPD1:U$1.1 BSPD1:U$2.2 BSPD1:U$3.COIL+ BSPD1:U$4.4 BSPD1:U$5.3 BSPD1:U$6.3 BSPD1:U$10.4 BSPD1:U$12.4 BUTTON.1 C1.2 C2.2 C3.1 C4.1 C5.2 C6.1 C7.1 C8.2 D3.A IC2.2 IC3.2 LED8.C LED9.C PEDALS.2 PEDALS.5 PEDALS.8 PI_EVEN.3 POWER.8 R2.1 R3.1 R4.1 R6.1 R9.2 R14.2 R24.1 R25.2 R26.2 R27.2 R28.2 R30.2 SOFTWARE_SHUTOFF.1 U$1.GND U$2.P$1 U$3.2 U$3.8 U$4.2 U$4.4 U$4.6 U$4.8 U$6.2 U$6.4 U$6.6 U$6.8 U$10.2 U$11.9 U$12.3 U$18.9 U$18.14 U$23.4 X1.2 X2.2 X3.2 X4.2 X4.5 X4.8 X5.8
GND1: ADXL345_BREAKOUT1.3 BSPD1:C2.2 BSPD1:CALIBRATE4.3 BSPD1:CALIBRATE5.3 BSPD1:CALIBRATE6.3 BSPD1:D3.A BSPD1:D4.A BSPD1:R15.2 BSPD1:R16.2 BSPD1:R17.1 BSPD1:U$7.4 BSPD1:U$8.4 BSPD1:U$9.2 BSPD1:U$14.COIL+ BSPD1:U$15.4 BSPD1:U$16.1 BSPD1:U$19.3 BSPD1:U$20.3 BUTTON1.1 C9.2 C10.2 C11.1 C12.1 C13.1 C14.1 C15.2 C16.2 D1.A IC1.2 IC4.2 LED17.C LED18.C PEDALS1.2 PEDALS1.5 PEDALS1.8 PI_EVEN1.3 POWER1.8 R34.1 R35.1 R36.1 R37.1 R39.2 R50.1 R51.2 R52.2 R53.2 R54.2 R61.2 R62.2 SOFTWARE_SHUTOFF1.1 U$24.GND U$25.2 U$25.8 U$27.2 U$27.4 U$27.6 U$27.8 U$28.2 U$28.4 U$28.6 U$28.8 U$31.2 U$32.9 U$33.3 U$39.9 U$39.14 U$45.P$1 U$46.4 X7.2 X8.2 X9.2 X10.2 X10.5 X10.8 X11.8
INT: PI_EVEN.11 U$11.12
INT1: PI_EVEN1.11 U$32.12
LED1: LED4.A PI_ODD.8
LED2: LED6.A PI_ODD.7
LED3: LED15.A PI_ODD1.7
LED4: LED13.A PI_ODD1.8
MISO: PI_ODD.11 U$11.15
MISO1: PI_ODD1.11 U$32.15
MISO_TEENSY: U$1.D12 U$18.12
MISO_TEENSY1: U$24.D12 U$39.12
MOSI: PI_ODD.10 U$11.14
MOSI1: PI_ODD1.10 U$32.14
MOSI_TEENSY: U$1.D11 U$18.11
MOSI_TEENSY1: U$24.D11 U$39.11
N$1: R7.1 U$6.9
N$2: U$1.D4(CANRX) U$3.4
N$3: R8.1 U$6.11
N$4: U$4.16 U$9.2 U$20.2
N$5: U$1.D3(CANTX) U$3.1
N$6: U$4.14 U$21.2 U$22.2
N$7: R13.1 R14.1 U$23.3
N$8: LED8.A R12.2
N$9: LED9.A R29.2
N$10: U$24.D4(CANRX) U$25.4
N$11: U$24.D3(CANTX) U$25.1
N$12: D3.C R12.1 SOFTWARE_SHUTOFF.2 U$5.3
N$13: LED10.C R34.2
N$14: LED1.C R2.2
N$15: LED2.C R3.2
N$16: LED3.C R4.2
N$17: LED11.C R35.2
N$18: LED12.C R36.2
N$19: R15.2 U$6.7
N$20: R37.2 U$26.2
N$21: D1.C R59.1 SOFTWARE_SHUTOFF1.2 U$26.3
N$22: R6.2 U$5.2
N$23: R40.2 U$28.7
N$24: R16.2 U$6.5
N$25: R41.2 U$28.5
N$26: R42.2 U$28.3
N$27: R21.2 U$4.3
N$28: R17.2 U$6.3
N$29: R18.2 U$6.1
N$30: R43.2 U$28.1
N$31: R19.2 U$4.7
N$32: R20.2 U$4.5
N$33: R44.2 U$27.7
N$34: R45.2 U$27.5
N$35: R22.2 U$4.1
N$36: R46.2 U$27.3
N$37: U$10.1 U$11.1
N$38: R47.2 U$27.1
N$39: U$10.4 U$11.2
N$40: C6.2 CRYSTAL.2 U$11.8
N$41: R24.2 U$10.8
N$42: C7.2 CRYSTAL.1 U$11.7
N$43: C3.2 R5.1
N$44: U$31.1 U$32.1
N$45: U$31.4 U$32.2
N$46: C13.2 CRYSTAL1.2 U$32.8
N$47: R50.2 U$31.8
N$48: C14.2 CRYSTAL1.1 U$32.7
N$49: C11.2 R48.1
N$50: C4.2 R23.1
N$51: C12.2 R49.1
N$52: LED4.C R25.1
N$53: LED5.C R26.1
N$54: LED6.C R27.1
N$61: LED7.C R28.1
N$62: LED13.C R51.1
N$63: LED14.C R52.1
N$64: LED15.C R53.1
N$65: LED16.C R54.1
N$66: R55.1 U$28.9
N$67: R56.1 U$28.11
N$68: U$27.16 U$41.2 U$42.2
N$69: U$27.14 U$43.2 U$44.2
N$70: LED17.A R59.2
N$71: LED18.A R60.2
N$72: R38.1 R39.1 U$46.3
N$73: JP3.3 R75.2 U$47.A4
N$74: JP3.4 R76.2 U$47.A5
N$75: C17.1 C20.2 IC5.3 U$48.8
N$76: C17.2 C19.1 C20.1 IC5.2 JP5.2 U$48.5 U$49.-VIN
N$77: C19.2 IC5.1 JP5.1 U$49.+VIN
N$78: JP5.4 R67.1 U$48.7
N$79: JP5.3 R67.2 U$48.6
N$80: U$47.D0(RX1) U$48.3
N$81: U$47.D1(TX1) U$48.2
N$82: C18.2 U$47.VIN U$48.1 U$49.+VOUT
N$83: C18.1 U$47.GND U$48.4 U$49.-VOUT
N$84: JP2.4 R68.2 U$47.A8
N$85: JP4.4 R69.2 U$47.A2
N$91: JP7.1 R89.2
N$92: JP8.8 R96.1
N$93: JP8.7 R95.1
N$94: JP7.2 R90.2
N$95: JP8.6 R94.1
N$96: JP7.3 R91.2
N$97: JP8.5 R93.1
N$98: JP7.4 R92.2
N$99: JP7.5 R93.2
N$100: JP8.4 R92.1
N$101: JP8.3 R91.1
N$102: JP7.6 R94.2
N$103: JP7.7 R95.2
N$104: JP8.2 R90.1
N$105: JP8.1 R89.1
N$106: JP7.8 R96.2
N$107: JP9.1 R97.2
N$108: JP10.8 R104.1
N$109: JP10.7 R103.1
N$110: JP9.2 R98.2
N$111: JP10.6 R102.1
N$112: JP9.3 R99.2
N$113: JP10.5 R101.1
N$114: JP9.4 R100.2
N$115: JP9.5 R101.2
N$116: JP10.4 R100.1
N$117: JP10.3 R99.1
N$118: JP9.6 R102.2
N$119: JP9.7 R103.2
N$120: JP10.2 R98.1
N$121: JP10.1 R97.1
N$122: JP9.8 R104.2
READ_BRAKE: U$18.3 U$23.6 U$23.7
READ_BRAKE1: U$39.3 U$46.6 U$46.7
READ_CHARGE: BSPD1:U$12.1 BSPD1:U$12.2 LED2.A U$16.P$1 U$18.6
READ_CHARGE1: BSPD1:U$8.1 BSPD1:U$8.2 LED11.A U$37.P$1 U$39.6
READ_FAULT: BSPD1:U$12.6 BSPD1:U$12.7 LED3.A POWER.5 U$15.P$1 U$18.7 X5.5
READ_FAULT1: BSPD1:U$8.6 BSPD1:U$8.7 LED12.A POWER1.5 U$36.P$1 U$39.7 X11.5
READ_SWITCH: BSPD1:U$6.4 LED1.A POWER.6 U$17.P$1 U$18.5 X5.6
READ_SWITCH1: BSPD1:U$20.4 LED10.A POWER1.6 U$38.P$1 U$39.5 X11.6
READ_UPSTREAM_SHUTDOWN: U$18.4 U$23.1 U$23.2
READ_UPSTREAM_SHUTDOWN1: U$39.4 U$46.1 U$46.2
SCK: PI_ODD.12 U$11.13
SCK1: PI_ODD1.12 U$32.13
SCK_TEENSY: U$1.D13 U$18.13
SCK_TEENSY1: U$24.D13 U$39.13
SCL: ADXL345_BREAKOUT.8 R31.1 U$1.A5
SCL1: ADXL345_BREAKOUT1.8 R63.1 U$24.A5
SDA: ADXL345_BREAKOUT.7 R32.1 U$1.A4
SDA1: ADXL345_BREAKOUT1.7 R64.1 U$24.A4
SHUTDOWN_A: POWER.1 R13.2 SOFTWARE_SHUTOFF.P X5.1
SHUTDOWN_A1: POWER1.1 R38.2 SOFTWARE_SHUTOFF1.P X11.1
SHUTDOWN_B: BSPD1:U$1.P R29.1 SOFTWARE_SHUTOFF.S
SHUTDOWN_B1: BSPD1:U$16.P R60.1 SOFTWARE_SHUTOFF1.S
SHUTDOWN_D: BSPD1:U$3.7 POWER.2 X5.2
SHUTDOWN_D1: BSPD1:U$14.7 POWER1.2 X11.2
SHUTDOWN_RELAY_CTRL: U$1.A2 U$5.1
SHUTDOWN_RELAY_CTRL1: U$24.A2 U$26.1
SIGNAL_ACCEL1: PEDALS.9 R9.1 R11.1 U$18.1 X4.9
SIGNAL_ACCEL2: PEDALS.6 R10.1 R30.1 U$18.2 X4.6
SIGNAL_ACCEL3: PEDALS1.6 R57.1 R62.1 U$39.2 X10.6
SIGNAL_ACCEL4: PEDALS1.9 R58.1 R61.1 U$39.1 X10.9
SIGNAL_BRAKE: BSPD1:R4.2 BSPD1:U$10.5 PEDALS.3 POWER.4 U$13.P$1 U$23.5 X4.3 X5.4
SIGNAL_BRAKE1: BSPD1:R13.2 BSPD1:U$7.5 PEDALS1.3 POWER1.4 U$34.P$1 U$46.5 X10.3 X11.4
SIGNAL_CURRENT: BSPD1:R7.1 BSPD1:U$10.3 POWER.3 U$14.P$1 X5.3
SIGNAL_CURRENT1: BSPD1:R14.1 BSPD1:U$7.3 POWER1.3 U$35.P$1 X11.3
THERM1: JP1.2 R65.2 U$47.A9
THERM2: JP1.3 R70.2 U$47.A10
THERM3: JP1.4 R71.2 U$47.A11
THERM4: JP2.2 R72.2 U$47.A6
THERM5: JP2.3 R73.2 U$47.A7
THERM6: JP3.2 R74.2 U$47.A3
THERM9: JP4.2 R77.2 U$47.A0
THERM10: JP4.3 R66.2 U$47.A1
TS_GND: JP6.2 R65.1 R66.1 R68.1 R69.1 R70.1 R71.1 R72.1 R73.1 R74.1 R75.1 R76.1 R77.1

## Tracks (layer width: path | path; a pad name or v marks a point on that pad's centre or on a via)
3.3V  (via drill 0.4)
  Top 0.406: v221.87,68.33 v235.84,68.33 v249.81,68.33 v263.78,68.33 265.05,68.33 271.4,74.68 271.4,76.58 270.13,77.85 266.83,77.85 v266.19,78.49
  Bottom 0.406: JP4.1 220.6,67.06 v221.87,68.33 | JP3.1 234.57,67.06 v235.84,68.33 | JP2.1 248.54,67.06 v249.81,68.33 | JP1.1 262.51,67.06 v263.78,68.33 | U$47.3.3V 265.05,79.63 v266.19,78.49
3.3V+
  Bottom 0.406: U$1.3.3V 63.38,97.79 60.72,95.12 R32.2 R31.2
3.3V+1
  Bottom 0.406: U$24.3.3V 172.6,97.79 169.94,95.12 R64.2 R63.2
+5V  (via drill 0.4, 0.45, 0.5, 0.55, 0.6, 0.7)
  Top 0.406: X4.1 81.28,21.84 | U$12.5 31.77,41.47 v33.02,42.72 | 82.8,50.8 84.23,50.8 85.32,51.89 v86.18,51.89 | U$18.15 U$18.16 36.07,25.65 v36.96,25.65 | v17.02,44.58 17.53,45.09 17.53,49.77 U$20.1 U$22.1 | 86.36,98.81 v89.28,95.89 | 86.36,98.81 BSPD1:CALIBRATE1.1 86.36,102.36 75.95,112.78 75.95,116.59 77.98,118.62 77.98,127.51 69.72,135.76 ADXL345_BREAKOUT.1 | v82.04,100.08 85.09,100.08 86.36,98.81 | v75.95,76.96 v80.9,76.96 | v22.73,19.94 v27.56,19.94 | U$23.8 30.67,19.62 v29.97,18.92 | U$1.VIN 63.61,102.87 61.07,100.33 61.07,100.31 60.9,100.14 60.9,86.78 v54.99,80.87
  Top 0.61: v69.09,104.14 72.9,104.14 BSPD1:CALIBRATE3.1 75.44,100.46 v76.96,98.93 | X4.1 82.8,23.32 82.8,27.81 | 82.8,27.81 82.8,50.8 82.8,59.31 v83.82,60.33 | v80.39,64.36 75.59,64.36 v74.17,65.79 74.17,67.69 76.63,70.16 76.63,72.34 75.95,73.03 v75.95,76.96 | PEDALS.4 53.22,42.62 50.31,42.62 PEDALS.7 47.87,27.95 v50.16,25.65 | 45.85,10.4 LED7.A | 45.85,10.4 C8.1 45.46,8.76 IC3.3 | v71.37,11.68 47.13,11.68 45.85,10.4 | R11.2 64.39,22.43 X4.4 | R10.2 82.67,27.95 82.8,27.81
  Bottom 0.406: BSPD1:U$12.8 74.1,85.34 76.15,85.34 | BSPD1:U$10.8 73.91,65.85 v74.17,65.79 | BSPD1:U$4.8 74.17,75.5 | PEDALS.7 45.64,37.95 41.73,37.95 39.01,40.66 35.08,40.66 v33.02,42.72 | BSPD1:U$5.5 84.36,52.38 85.7,52.38 v86.18,51.89 86.96,51.11 86.96,50.59 BSPD1:U$6.5 | v17.02,44.58 17.4,44.2 17.4,22.1 19.56,19.94 v22.73,19.94 | BSPD1:CALIBRATE2.1 97.28,100.97 92.2,95.89 v89.28,95.89 | v82.04,100.08 79.76,100.08 78.23,101.6 BSPD1:CALIBRATE3.1 | BSPD1:U$4.8 74.04,74.68 | v75.95,76.96 74.48,75.5 BSPD1:U$4.8 | 28.83,19.94 v27.56,19.94 | 28.83,19.94 31.24,19.94 v36.96,25.65 | BSPD1:R5.2 84.71,61.21 v83.82,60.33 | v29.97,18.92 29.84,18.92 28.83,19.94 | v54.99,80.87 54.48,80.37 U$3.3 | BSPD1:R7.2 81.41,77.47 v80.9,76.96 80.9,76.7 BSPD1:R4.1
  Bottom 0.61: PEDALS.7 47.87,41.48 PEDALS.1 | X4.7 72.42,18.82 68.38,18.82 65.41,21.79 X4.4 61.72,21.79 57.86,25.65 v50.16,25.65 v36.96,25.65 | X4.7 75.44,15.95 X4.1 | U$1.VIN 65.79,104.14 v69.09,104.14 | v75.95,76.96 76.15,77.17 76.15,85.34 76.15,97.61 76.96,98.42 v76.96,98.93 | v71.37,11.68 75.44,15.75 X4.7 | v83.82,60.33 83.82,60.94 v80.39,64.36
+5V1  (via drill 0.4, 0.45, 0.5, 0.55, 0.6, 0.7)
  Top 0.406: X10.1 190.5,21.84 | U$33.5 140.99,41.47 v142.24,42.72 | 192.02,50.8 193.45,50.8 194.54,51.89 v195.4,51.89 | U$39.15 U$39.16 145.29,25.65 v146.18,25.65 | v126.24,44.58 126.75,45.09 126.75,49.77 U$42.1 U$44.1 | 195.58,98.81 v198.5,95.89 | 195.58,98.81 BSPD1:CALIBRATE4.1 195.58,102.36 185.17,112.78 185.17,116.59 187.2,118.62 187.2,127.51 178.94,135.76 ADXL345_BREAKOUT1.1 | v191.26,100.08 194.31,100.08 195.58,98.81 | v185.17,76.96 v190.12,76.96 | v131.95,19.94 v136.78,19.94 | U$46.8 139.89,19.62 v139.19,18.92 | U$24.VIN 172.83,102.87 170.29,100.33 170.29,100.31 170.12,100.14 170.12,86.78 v164.21,80.87
  Top 0.61: v178.31,104.14 182.12,104.14 BSPD1:CALIBRATE6.1 184.66,100.46 v186.18,98.93 | X10.1 192.02,23.32 192.02,27.81 | 192.02,27.81 192.02,50.8 192.02,59.31 v193.04,60.33 | v189.61,64.36 184.81,64.36 v183.39,65.79 183.39,67.69 185.85,70.16 185.85,72.34 185.17,73.03 v185.17,76.96 | PEDALS1.4 162.44,42.62 159.53,42.62 PEDALS1.7 157.09,27.95 v159.38,25.65 | 155.07,10.4 LED16.A | 155.07,10.4 C16.1 154.68,8.76 IC4.3 | v180.59,11.68 156.35,11.68 155.07,10.4 | R58.2 173.61,22.43 X10.4 | R57.2 191.89,27.95 192.02,27.81
  Bottom 0.406: BSPD1:U$8.8 183.32,85.34 185.37,85.34 | BSPD1:U$7.8 183.13,65.85 v183.39,65.79 | BSPD1:U$15.8 183.39,75.5 | PEDALS1.7 154.86,37.95 150.95,37.95 148.23,40.66 144.3,40.66 v142.24,42.72 | BSPD1:U$19.5 193.58,52.38 194.92,52.38 v195.4,51.89 196.18,51.11 196.18,50.59 BSPD1:U$20.5 | v126.24,44.58 126.62,44.2 126.62,22.1 128.78,19.94 v131.95,19.94 | BSPD1:CALIBRATE5.1 206.5,100.97 201.42,95.89 v198.5,95.89 | v191.26,100.08 188.98,100.08 187.45,101.6 BSPD1:CALIBRATE6.1 | BSPD1:U$15.8 183.26,74.68 | v185.17,76.96 183.7,75.5 BSPD1:U$15.8 | 138.05,19.94 v136.78,19.94 | 138.05,19.94 140.46,19.94 v146.18,25.65 | BSPD1:R11.2 193.93,61.21 v193.04,60.33 | v139.19,18.92 139.06,18.92 138.05,19.94 | v164.21,80.87 163.7,80.37 U$25.3 | BSPD1:R14.2 190.63,77.47 v190.12,76.96 190.12,76.7 BSPD1:R13.1
  Bottom 0.61: PEDALS1.7 157.09,41.48 PEDALS1.1 | X10.7 181.63,18.82 177.6,18.82 174.62,21.79 X10.4 170.94,21.79 167.08,25.65 v159.38,25.65 v146.18,25.65 | X10.7 184.66,15.95 X10.1 | U$24.VIN 175.01,104.14 v178.31,104.14 | v185.17,76.96 185.37,77.17 185.37,85.34 185.37,97.61 186.18,98.42 v186.18,98.93 | v180.59,11.68 184.66,15.75 X10.7 | v193.04,60.33 193.04,60.94 v189.61,64.36
+5V/1  (via drill 0.4)
  Top 0.406: 24.09,123.95 U$11.18 | U$11.18 U$11.17 | U$11.18 24.13,125.35 19.61,129.87 14.17,129.87 11.53,127.23 11.53,122.58 12.83,121.28 | v8.1,88.44 8.1,116.43 12.83,121.16 12.83,121.28 | U$10.3 18.67,117.86 18.16,117.35 16.76,117.35 12.83,121.28
  Top 0.61: IC2.3 32.07,9.08 C2.1 26.04,9.13 26.04,10.41 27.96,12.34 LED5.A
  Bottom 0.406: v8.1,88.44 8.1,75.51 5.66,73.08
  Bottom 0.61: PI_EVEN.1 3.02,75.72 5.66,73.08 5.66,56.9 7.34,55.22 16.1,55.22 24.04,47.28 24.04,15.89 31.17,8.76 IC2.3
+5V/2  (via drill 0.4)
  Top 0.406: 133.31,123.95 U$32.18 | U$32.18 U$32.17 | U$32.18 133.35,125.35 128.83,129.87 123.39,129.87 120.75,127.23 120.75,122.58 122.05,121.28 | v117.32,88.44 117.32,116.43 122.05,121.16 122.05,121.28 | U$31.3 127.89,117.86 127.38,117.35 125.98,117.35 122.05,121.28
  Top 0.61: IC1.3 141.29,9.08 C9.1 135.25,9.13 135.25,10.41 137.19,12.34 LED14.A
  Bottom 0.406: v117.32,88.44 117.32,75.51 114.88,73.08
  Bottom 0.61: PI_EVEN1.1 112.24,75.72 114.88,73.08 114.88,56.9 116.56,55.22 125.32,55.22 133.26,47.28 133.26,15.89 140.39,8.76 IC1.3
+12V  (via drill 0.4, 0.45, 0.6, 0.65, 0.85)
  Top 0.406: 10.41,66.55 10.29,66.42 U$6.14 | 10.41,66.55 7.75,66.55 | U$4.12 28.32,54.99 28.32,57.53 | 10.41,66.55 12.83,66.55 U$6.16 12.83,59.59 15.53,56.88 19.98,56.88 23.29,60.2 v26.34,60.2 27.3,60.2 28.32,59.18 28.32,57.53 | 7.75,66.55 U$6.12 | U$6.10 5.21,66.55 7.75,66.55 | U$4.10 28.32,57.53 | 21.45,51.18 U$9.1 | 21.45,51.18 U$21.1 | v24.77,48.51 24.77,50.8 24.4,51.17 21.47,51.17 21.45,51.18 | BSPD1:U$2.4 v98.81,64.01
  Top 0.61: v87.12,43.43 93.85,50.16 v93.85,52.07 | POWER.7 102.62,78.39 v102.62,99.19 | C5.1 44.32,2.53 43.17,3.68 IC3.1 | C1.1 31.44,2.73 IC2.1 | BSPD1:U$3.4 76.58,97.66 75.56,97.66 v74.55,98.68
  Top 1.27: v33.43,100.31 33.43,100.51 27.76,106.17 17.2,106.17 X3.1 | X5.7 59.64,129.54 49.28,129.54 48.01,128.27 v48.01,128.14
  Bottom 0.406: 23.81,51.5 23.94,51.5 | v24.77,48.51 24.77,49.91 25.15,50.29 | v98.81,64.01 98.55,63.75 95.83,63.75
  Bottom 0.61: 70.23,105.66 46.35,105.66 | 70.23,105.66 97.54,105.66 102.62,100.58 v102.62,99.19 | X2.1 40.64,71.64 40.64,66.8 | 40.64,66.8 41.91,65.53 U$5.4 | 26.34,62.36 v26.34,60.2 | 26.34,62.36 21.74,57.76 21.74,53.7 23.94,51.5 25.15,50.29 26.23,49.21 26.23,48.07 25.27,47.12 25.27,18.8 34.92,9.14 34.92,3.68 | 26.34,62.36 30.79,66.8 40.64,66.8 | POWER.7 98.3,74.08 98.3,70.23 95.83,67.77 95.83,63.75 95.83,58.29 93.85,56.31 v93.85,52.07 | BSPD1:U$1.2 80.91,43.3 BSPD1:D2.C 86.98,43.3 v87.12,43.43 | IC3.1 34.92,3.68 | 34.92,3.68 IC2.1 | v74.55,98.68 73.79,99.44 70.1,99.44 68.83,100.71 68.83,102.23 70.23,103.63 70.23,105.66
  Bottom 1.27: 43.49,87.62 33.43,97.69 v33.43,100.31 | 43.49,87.62 X1.1 | 43.49,87.62 46.35,90.49 46.35,105.66 46.35,110.74 48.01,112.39 v48.01,128.14
  Bottom 1.778: X1.1 46.41,83.7 46.41,80.95 43.49,78.04 X2.1
+12V1  (via drill 0.4, 0.45, 0.6, 0.65, 0.85)
  Top 0.406: 119.63,66.55 119.51,66.42 U$28.14 | 119.63,66.55 116.97,66.55 | U$27.12 137.54,54.99 137.54,57.53 | 119.63,66.55 122.05,66.55 U$28.16 122.05,59.59 124.75,56.88 129.2,56.88 132.51,60.2 v135.56,60.2 136.53,60.2 137.54,59.18 137.54,57.53 | 116.97,66.55 U$28.12 | U$28.10 114.43,66.55 116.97,66.55 | U$27.10 137.54,57.53 | 130.67,51.18 U$41.1 | 130.67,51.18 U$43.1 | v133.99,48.51 133.99,50.8 133.62,51.17 130.69,51.17 130.67,51.18 | BSPD1:U$9.4 v208.03,64.01
  Top 0.61: v196.34,43.43 203.07,50.16 v203.07,52.07 | POWER1.7 211.84,78.39 v211.84,99.19 | C15.1 153.54,2.53 152.39,3.68 IC4.1 | C10.1 140.66,2.73 IC1.1 | BSPD1:U$14.4 185.8,97.66 184.78,97.66 v183.77,98.68
  Top 1.27: v142.65,100.31 142.65,100.51 136.98,106.17 126.42,106.17 X9.1 | X11.7 168.86,129.54 158.5,129.54 157.23,128.27 v157.23,128.14
  Bottom 0.406: 133.03,51.5 133.16,51.5 | v133.99,48.51 133.99,49.91 134.37,50.29 | v208.03,64.01 207.77,63.75 205.05,63.75
  Bottom 0.61: 179.45,105.66 155.57,105.66 | 179.45,105.66 206.76,105.66 211.84,100.58 v211.84,99.19 | X8.1 149.86,71.64 149.86,66.8 | 149.86,66.8 151.13,65.53 U$26.4 | 135.56,62.36 v135.56,60.2 | 135.56,62.36 130.96,57.76 130.96,53.7 133.16,51.5 134.37,50.29 135.45,49.21 135.45,48.07 134.49,47.12 134.49,18.8 144.15,9.14 144.15,3.68 | 135.56,62.36 140,66.8 149.86,66.8 | POWER1.7 207.52,74.08 207.52,70.23 205.05,67.77 205.05,63.75 205.05,58.29 203.07,56.31 v203.07,52.07 | BSPD1:U$16.2 190.13,43.3 BSPD1:D4.C 196.2,43.3 v196.34,43.43 | IC4.1 144.15,3.68 | 144.15,3.68 IC1.1 | v183.77,98.68 183.01,99.44 179.32,99.44 178.05,100.71 178.05,102.23 179.45,103.63 179.45,105.66
  Bottom 1.27: 152.71,87.62 142.65,97.69 v142.65,100.31 | 152.71,87.62 X7.1 | 152.71,87.62 155.57,90.49 155.57,105.66 155.57,110.74 157.23,112.39 v157.23,128.14
  Bottom 1.778: X7.1 155.63,83.7 155.63,80.95 152.71,78.04 X8.1
BSPD1:N$1
  Top 0.406: BSPD1:U$3.COIL- 88.65,68.07 99.14,68.07 101.35,65.86 BSPD1:U$2.3
  Bottom 0.406: BSPD1:U$3.COIL- 83.44,73.28 81.97,73.28 79.93,75.31 79.93,77.42 81.79,79.27 81.79,82.3 | 81.79,82.3 81.79,87.45 | BSPD1:D1.C 81.79,90.03 81.79,87.45 | 81.79,87.45 BSPD1:U$3.3 | BSPD1:R2.2 81.79,82.3
BSPD1:N$2  (via drill 0.4)
  Top 0.406: v84.43,58.93 v84.43,53.39
  Bottom 0.406: v84.43,53.39 83.48,53.39 BSPD1:U$5.4 | BSPD1:R3.2 84.56,59.05 v84.43,58.93
BSPD1:N$3
  Top 0.406: BSPD1:R6.2 96.48,62.06 BSPD1:U$2.1
BSPD1:N$4  (via drill 0.45)
  Top 0.406: BSPD1:R6.1 96.45,60.01 v98.42,58.04 | v98.42,53.65 100.33,51.74 BSPD1:BSPD_ENABLE.1
  Bottom 0.406: v98.42,58.04 v98.42,53.65
BSPD1:N$5  (via drill 0.45)
  Top 0.406: v73.03,58.55 74.55,57.02 76.45,57.02 77.72,58.29 77.72,60.71 80.39,63.37 87.12,63.37 90.81,67.06 v91.95,67.06 | v91.95,72.52 92.58,73.15 92.58,85.22 93.73,86.36 95.5,86.36 96.14,87 96.14,91.69 v92.84,95
  Bottom 0.406: BSPD1:CALIBRATE2.2 96.27,103.12 98.42,103.12 98.81,102.74 98.81,100.97 v92.84,95 | BSPD1:U$10.2 71.5,59.56 72.52,58.55 v73.03,58.55 | v91.95,67.06 v91.95,72.52
BSPD1:N$6  (via drill 0.45)
  Top 0.406: v77.6,70.36 77.6,75.06 78.49,75.95 81.28,75.95 82.68,77.34 v82.68,79.25
  Bottom 0.406: BSPD1:CALIBRATE1.2 83.82,101.09 84.58,100.33 84.58,98.42 83.44,97.28 83.44,88.01 82.68,87.25 v82.68,79.25 | BSPD1:U$10.6 70.23,67.18 70.74,67.69 74.93,67.69 v77.6,70.36
BSPD1:N$7
  Bottom 0.406: BSPD1:U$4.2 72.77,71.98 77.09,76.3 77.09,91.44 78.68,93.03 81.09,93.03 81.53,93.47 81.53,96.14 77.47,100.2 74.3,100.2 BSPD1:CALIBRATE3.2
BSPD1:N$8  (via drill 0.45)
  Top 0.406: v79.12,74.55 81.03,74.55 83.69,77.22 86.36,77.22 87.63,75.95 87.63,73.15 91.82,68.96 100.08,68.96 102.36,66.67 102.36,64.14 100.2,61.98 v100.08,61.98 | BSPD1:BSPD_ENABLE.2 98.55,44.96 96.39,47.12 v96.39,52.96
  Bottom 0.406: BSPD1:U$4.1 74.04,71.63 76.96,74.55 v79.12,74.55 | v96.39,52.96 96.39,57.66 100.08,61.34 v100.08,61.98
BSPD1:N$9  (via drill 0.4)
  Top 0.406: v75.2,83.95 78.23,80.92 v78.23,78.87
  Bottom 0.406: BSPD1:R2.1 BSPD1:R1.2 78.48,79.11 v78.23,78.87 | BSPD1:U$12.5 70.23,84.33 70.87,83.69 74.93,83.69 75.18,83.95 v75.2,83.95
BSPD1:N$10
  Bottom 0.406: BSPD1:U$8.3 180.72,79.12 178.05,76.45 178.05,74.07 180.72,71.4 BSPD1:U$15.3 180.72,69.06 181.31,68.48 181.32,68.49 183.68,68.49 186.78,71.59 189.78,71.59 197.37,64 BSPD1:C2.1 BSPD1:R11.1 BSPD1:R10.1
BSPD1:N$11
  Bottom 0.406: BSPD1:U$15.2 181.99,71.98 186.31,76.3 186.31,91.44 187.9,93.03 190.31,93.03 190.75,93.47 190.75,96.14 186.69,100.2 183.51,100.2 BSPD1:CALIBRATE6.2
BSPD1:N$12
  Top 0.406: BSPD1:U$14.COIL- 197.87,68.07 208.36,68.07 210.57,65.86 BSPD1:U$9.3
  Bottom 0.406: BSPD1:U$14.COIL- 192.66,73.28 191.19,73.28 189.15,75.31 189.15,77.42 191.01,79.27 191.01,82.3 | 191.01,82.3 191.01,87.45 | BSPD1:D3.C 191.01,90.03 191.01,87.45 | 191.01,87.45 BSPD1:U$14.3 | BSPD1:R18.2 191.01,82.3
BSPD1:N$13
  Bottom 0.406: BSPD1:U$12.3 71.5,79.12 68.83,76.45 68.83,74.07 71.5,71.4 BSPD1:U$4.3 71.5,69.06 72.08,68.48 72.1,68.49 74.46,68.49 77.56,71.59 80.56,71.59 88.15,64 BSPD1:C1.1 BSPD1:R5.1 BSPD1:R3.1
BSPD1:N$14
  Top 0.406: BSPD1:R8.1 BSPD1:LED2.C
BSPD1:N$15
  Top 0.406: BSPD1:LED1.C BSPD1:R9.1
BSPD1:N$16  (via drill 0.45)
  Top 0.406: BSPD1:LED1.A 69.88,79.91 69.47,79.5 69.47,66.67 71.5,64.64 v71.5,64.01 71.5,61.4 73.37,59.53 74.77,59.53 v74.8,59.56 | v87.38,56.64 89.66,54.36 91.69,54.36 v92.2,53.85 93.6,55.24 98.68,55.24 103.12,59.69 103.12,77.6 103.5,77.98 103.5,98.42 103.76,98.68 103.76,99.82 102.62,100.97 102.62,104.14 103.76,105.28 103.76,113.54 100.08,117.22 95.17,117.22 BSPD1:U$11.P$1
  Bottom 0.406: BSPD1:U$5.2 82.68,48.51 83.31,47.88 84.33,47.88 84.71,48.26 86.49,48.26 86.77,47.98 BSPD1:U$6.2 86.74,47.11 86.74,46.35 87.25,45.85 88.14,45.85 92.84,50.55 92.84,53.21 v92.2,53.85 | v87.38,56.64 78.74,56.64 75.82,59.56 v74.8,59.56 | BSPD1:U$10.7 v71.5,64.01
BSPD1:N$17  (via drill 0.45)
  Top 0.406: BSPD1:LED2.A 70.48,79.16 70.48,66.93 73.91,63.5 73.91,60.52 v73.84,60.45 | v86.23,57.53 86.23,55.88 v88.65,53.47 91.06,53.47 91.95,52.58 92.33,52.58 94.23,54.48 99.19,54.48 103.89,59.18 103.89,77.22 104.39,77.72 104.39,98.17 104.52,98.3 104.52,100.58 v103.63,101.47
  Bottom 0.406: BSPD1:U$5.1 83.67,48.9 87,48.9 87.72,48.17 BSPD1:U$6.1 88.29,47.14 92.08,50.93 92.08,52.45 91.06,53.47 v88.65,53.47 | 72.77,60.33 BSPD1:U$10.1 72.97,60.45 v73.84,60.45 76.58,60.45 79.5,57.53 v86.23,57.53 | v103.63,101.47 98.42,106.68 94.74,106.68 92.81,108.61 BSPD1:U$13.P$1
BSPD1:N$18  (via drill 0.4)
  Top 0.406: v193.65,58.93 v193.65,53.39
  Bottom 0.406: v193.65,53.39 192.7,53.39 BSPD1:U$19.4 | BSPD1:R10.2 193.78,59.05 v193.65,58.93
BSPD1:N$19
  Top 0.406: BSPD1:R12.2 205.7,62.06 BSPD1:U$9.1
BSPD1:N$20
  Top 0.406: BSPD1:LED4.C BSPD1:R16.1
BSPD1:N$21
  Top 0.406: BSPD1:R15.1 BSPD1:LED3.C
BSPD1:N$22  (via drill 0.45)
  Top 0.406: BSPD1:LED4.A 179.09,79.91 178.69,79.5 178.69,66.67 180.72,64.64 v180.72,64.01 180.72,61.4 182.59,59.53 183.99,59.53 v184.02,59.56 | v196.6,56.64 198.88,54.36 200.91,54.36 v201.42,53.85 202.82,55.24 207.9,55.24 212.34,59.69 212.34,77.6 212.72,77.98 212.72,98.42 212.98,98.68 212.98,99.82 211.84,100.97 211.84,104.14 212.98,105.28 212.98,113.54 209.3,117.22 204.39,117.22 BSPD1:U$17.P$1
  Bottom 0.406: BSPD1:U$19.2 191.9,48.51 192.53,47.88 193.55,47.88 193.93,48.26 195.71,48.26 195.99,47.98 BSPD1:U$20.2 195.96,47.11 195.96,46.35 196.47,45.85 197.36,45.85 202.06,50.55 202.06,53.21 v201.42,53.85 | v196.6,56.64 187.96,56.64 185.04,59.56 v184.02,59.56 | BSPD1:U$7.7 v180.72,64.01
BSPD1:N$23  (via drill 0.45)
  Top 0.406: BSPD1:LED3.A 179.71,79.16 179.71,66.93 183.13,63.5 183.13,60.52 v183.06,60.45 | v195.45,57.53 195.45,55.88 v197.87,53.47 200.28,53.47 201.17,52.58 201.55,52.58 203.45,54.48 208.41,54.48 213.11,59.18 213.11,77.22 213.61,77.72 213.61,98.17 213.74,98.3 213.74,100.58 v212.85,101.47
  Bottom 0.406: BSPD1:U$19.1 192.89,48.9 196.22,48.9 196.94,48.17 BSPD1:U$20.1 197.51,47.14 201.29,50.93 201.29,52.45 200.28,53.47 v197.87,53.47 | 181.99,60.33 BSPD1:U$7.1 182.19,60.45 v183.06,60.45 185.8,60.45 188.72,57.53 v195.45,57.53 | v212.85,101.47 207.65,106.68 203.96,106.68 202.03,108.61 BSPD1:U$18.P$1
BSPD1:N$24  (via drill 0.45)
  Top 0.406: BSPD1:R12.1 205.67,60.01 v207.65,58.04 | v207.65,53.65 209.55,51.74 BSPD1:BSPD_ENABLE1.1
  Bottom 0.406: v207.65,58.04 v207.65,53.65
BSPD1:N$25  (via drill 0.45)
  Top 0.406: v188.34,74.55 190.25,74.55 192.91,77.22 195.58,77.22 196.85,75.95 196.85,73.15 201.04,68.96 209.3,68.96 211.58,66.67 211.58,64.14 209.42,61.98 v209.3,61.98 | BSPD1:BSPD_ENABLE1.2 207.77,44.96 205.61,47.12 v205.61,52.96
  Bottom 0.406: BSPD1:U$15.1 183.26,71.63 186.18,74.55 v188.34,74.55 | v205.61,52.96 205.61,57.66 209.3,61.34 v209.3,61.98
BSPD1:N$26  (via drill 0.45)
  Top 0.406: v182.25,58.55 183.77,57.02 185.67,57.02 186.94,58.29 186.94,60.71 189.61,63.37 196.34,63.37 200.03,67.06 v201.17,67.06 | v201.17,72.52 201.8,73.15 201.8,85.22 202.95,86.36 204.72,86.36 205.36,87 205.36,91.69 v202.06,95
  Bottom 0.406: BSPD1:CALIBRATE5.2 205.49,103.12 207.65,103.12 208.03,102.74 208.03,100.97 v202.06,95 | BSPD1:U$7.2 180.72,59.56 181.74,58.55 v182.25,58.55 | v201.17,67.06 v201.17,72.52
BSPD1:N$27  (via drill 0.45)
  Top 0.406: v186.82,70.36 186.82,75.06 187.71,75.95 190.5,75.95 191.9,77.34 v191.9,79.25
  Bottom 0.406: BSPD1:CALIBRATE4.2 193.04,101.09 193.8,100.33 193.8,98.42 192.66,97.28 192.66,88.01 191.9,87.25 v191.9,79.25 | BSPD1:U$7.6 179.45,67.18 179.96,67.69 184.15,67.69 v186.82,70.36
BSPD1:N$28  (via drill 0.4)
  Top 0.406: v184.42,83.95 187.45,80.92 v187.45,78.87
  Bottom 0.406: BSPD1:R18.1 BSPD1:R17.2 187.7,79.11 v187.45,78.87 | BSPD1:U$8.5 179.45,84.33 180.09,83.69 184.15,83.69 184.4,83.95 v184.42,83.95
BSPD1:SHUTDOWN_C
  Bottom 1.778: BSPD1:U$3.6 88.21,89.74 91.95,93.22 100.58,93.22 103.63,90.42 103.63,55.04 89.53,40.95 BSPD1:U$1.S
BSPD1:SHUTDOWN_C1
  Bottom 1.778: BSPD1:U$14.6 197.43,89.74 201.17,93.22 209.8,93.22 212.85,90.42 212.85,55.04 198.75,40.95 BSPD1:U$16.S
BUT  (via drill 0.4)
  Top 0.406: v4.29,128.96 v4.29,100.38
  Bottom 0.406: PI_ODD.2 4.29,82.6 v4.29,100.38 | BUTTON.3 33.53,129.87 30.58,126.92 24.74,126.92 20.42,131.24 12.17,131.24 9.88,128.96 v4.29,128.96
BUT1  (via drill 0.4)
  Top 0.406: v113.51,128.96 v113.51,100.38
  Bottom 0.406: PI_ODD1.2 113.51,82.6 v113.51,100.38 | BUTTON1.3 142.75,129.87 139.8,126.92 133.96,126.92 129.64,131.24 121.39,131.24 119.1,128.96 v113.51,128.96
CAN-H  (via drill 0.45)
  Top 0.406: U$10.7 19.94,112.78 20.7,112.01 21.84,112.01 22.99,113.16 v39.62,113.16 | R5.2 48.13,114.72 48.13,113.41 47.5,112.78 v42.04,112.78
  Bottom 0.406: v42.04,112.78 41.66,113.16 v39.62,113.16
CAN-H1  (via drill 0.45)
  Top 0.406: U$31.7 129.16,112.78 129.92,112.01 131.06,112.01 132.21,113.16 v148.84,113.16 | R48.2 157.35,114.72 157.35,113.41 156.72,112.78 v151.26,112.78
  Bottom 0.406: v151.26,112.78 150.88,113.16 v148.84,113.16
CAN-L  (via drill 0.4, 0.45)
  Top 0.406: U$10.6 18.67,112.57 18.16,112.06 11.4,112.06 v10.52,112.95 | v43.18,133.22 43.18,128.65 47.75,124.08 47.75,117.28 R23.2
  Bottom 0.406: v10.52,112.95 9.63,113.84 9.63,125.93 14.22,130.53 19.91,130.53 24.28,126.16 33.05,126.16 36.45,129.56 36.45,131.83 37.85,133.22 v43.18,133.22
CAN-L1  (via drill 0.4, 0.45)
  Top 0.406: U$31.6 127.89,112.57 127.38,112.06 120.62,112.06 v119.74,112.95 | v152.4,133.22 152.4,128.65 156.97,124.08 156.97,117.28 R49.2
  Bottom 0.406: v119.74,112.95 118.85,113.84 118.85,125.93 123.44,130.53 129.13,130.53 133.5,126.16 142.26,126.16 145.67,129.56 145.67,131.83 147.07,133.22 v152.4,133.22
CANH  (via drill 0.4, 0.45)
  Top 0.406: X2.4 35.28,73 35.28,77.5 | 35.28,77.5 35.28,79.7 X1.4 39.92,82.41 41.53,84.02 45.33,84.02 48.01,81.34 50.72,81.34 53.98,84.59 v53.98,89.15 | v33.63,79.12 35.26,77.5 35.28,77.5 | v52.7,106.93 52.07,106.3 v52.07,100.71 | POWER.10 100.03,100.16 100.71,100.84 100.71,105.41 v101.73,106.43
  Bottom 0.406: 33.63,79.15 v33.63,79.12 20.27,92.48 X3.4 | v52.7,106.93 54.74,108.97 54.74,121.54 55.75,122.56 75.69,122.56 79.07,125.93 X5.10 89.74,116.97 93.6,116.97 95.12,115.44 95.12,113.28 96.9,111.51 100.2,111.51 101.73,109.98 v101.73,106.43 | v52.07,100.71 52.07,92.58 53.98,90.68 v53.98,89.15 56.01,89.15 56.64,88.52 R1.1 56.65,86.24 55.75,85.34 U$3.7
CANH1  (via drill 0.4, 0.45)
  Top 0.406: X8.4 144.5,73 144.5,77.5 | 144.5,77.5 144.5,79.7 X7.4 149.14,82.41 150.75,84.02 154.55,84.02 157.23,81.34 159.94,81.34 163.19,84.59 v163.19,89.15 | v142.85,79.12 144.47,77.5 144.5,77.5 | v161.93,106.93 161.29,106.3 v161.29,100.71 | POWER1.10 209.25,100.16 209.93,100.84 209.93,105.41 v210.95,106.43
  Bottom 0.406: 142.85,79.15 v142.85,79.12 129.49,92.48 X9.4 | v161.93,106.93 163.96,108.97 163.96,121.54 164.97,122.56 184.91,122.56 188.29,125.93 X11.10 198.96,116.97 202.82,116.97 204.34,115.44 204.34,113.28 206.12,111.51 209.42,111.51 210.95,109.98 v210.95,106.43 | v161.29,100.71 161.29,92.58 163.19,90.68 v163.19,89.15 165.23,89.15 165.86,88.52 R33.1 165.87,86.24 164.97,85.34 U$25.7
CANL  (via drill 0.4, 0.45)
  Top 0.406: X1.3 39.67,88.29 44.86,88.29 46.58,86.57 52.86,86.57 v52.93,86.64 | v51.18,106.81 v51.18,101.6 | POWER.9 101.73,85.91 101.73,93.6 101.09,94.23 101.09,99.57 101.73,100.2 101.73,104.78 v102.62,105.66 | v26.29,107.95 25.15,109.09 X3.3